# Altium PCB LevitadorMagnetico.PcbDoc
Units mil, origin at the board's own origin, x right, y up, seen from the top; angles counter-clockwise.
Board outline 7874.02 x 5905.51 mil, 2 copper layers (Top Layer, Bottom Layer); 210 components, 111 nets, 574 pads, 24 vias.
Unrouted connection lines stored in the file: 227.
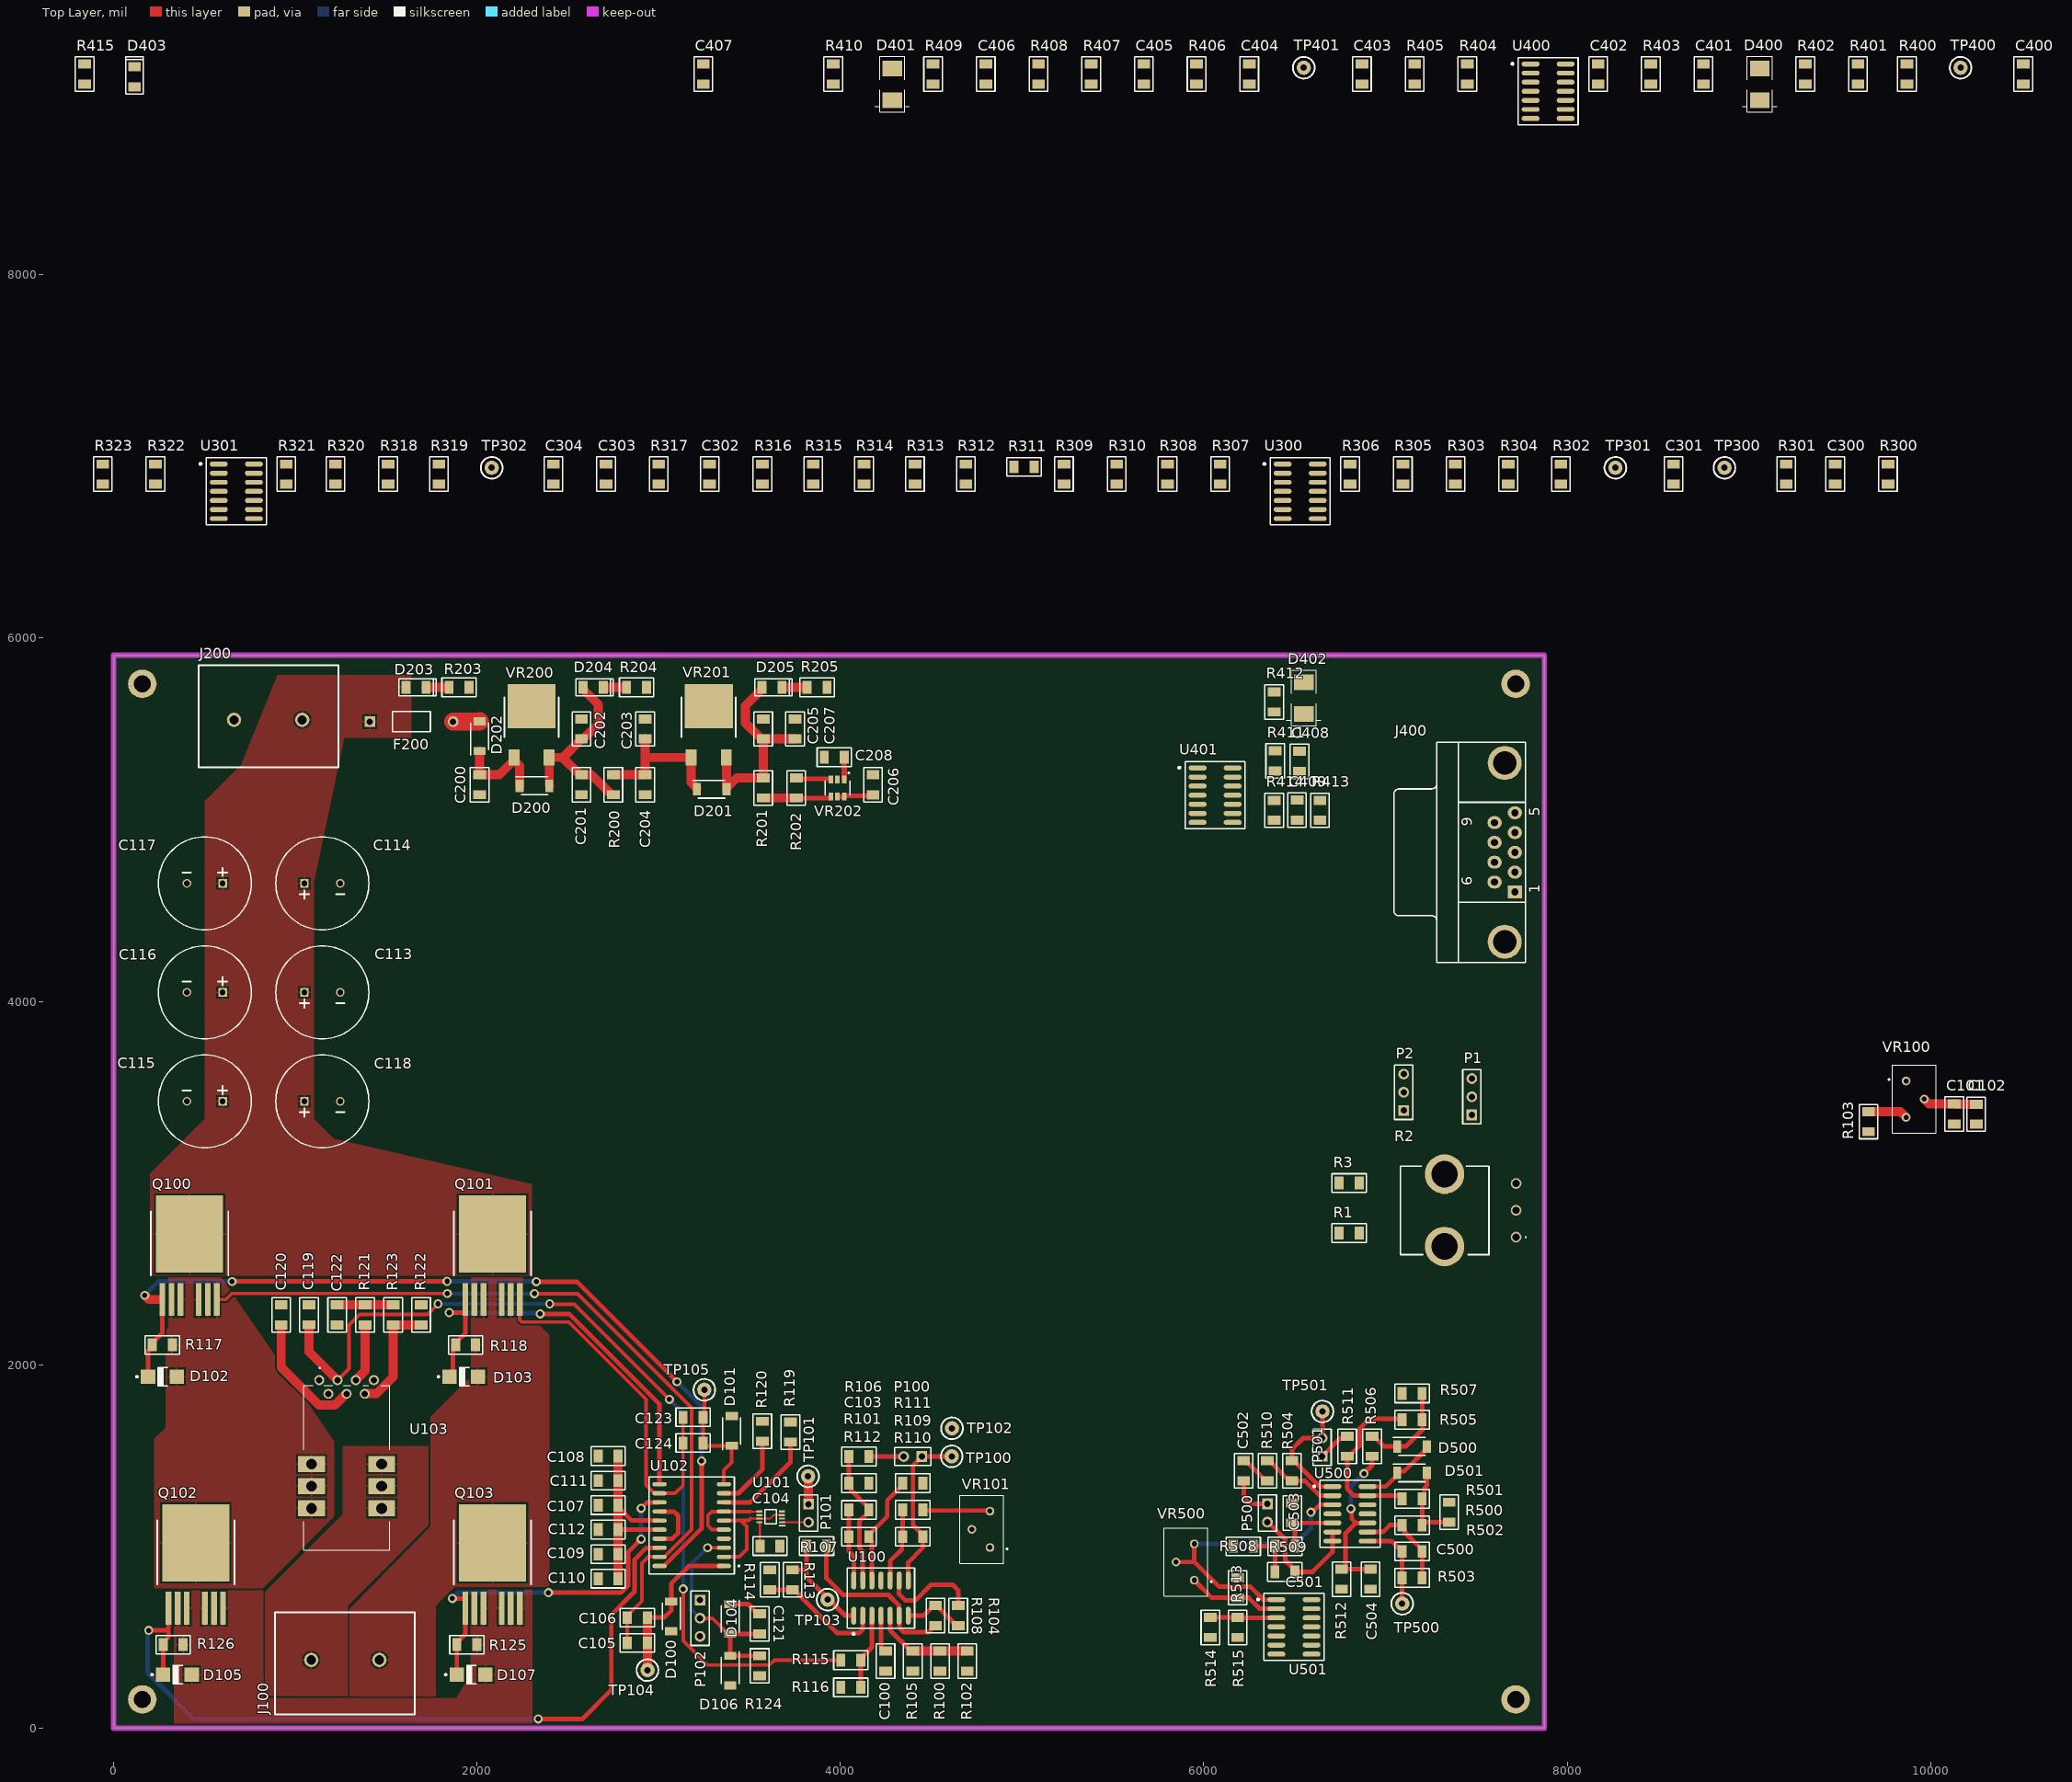
[diagram p0: Top Layer view]
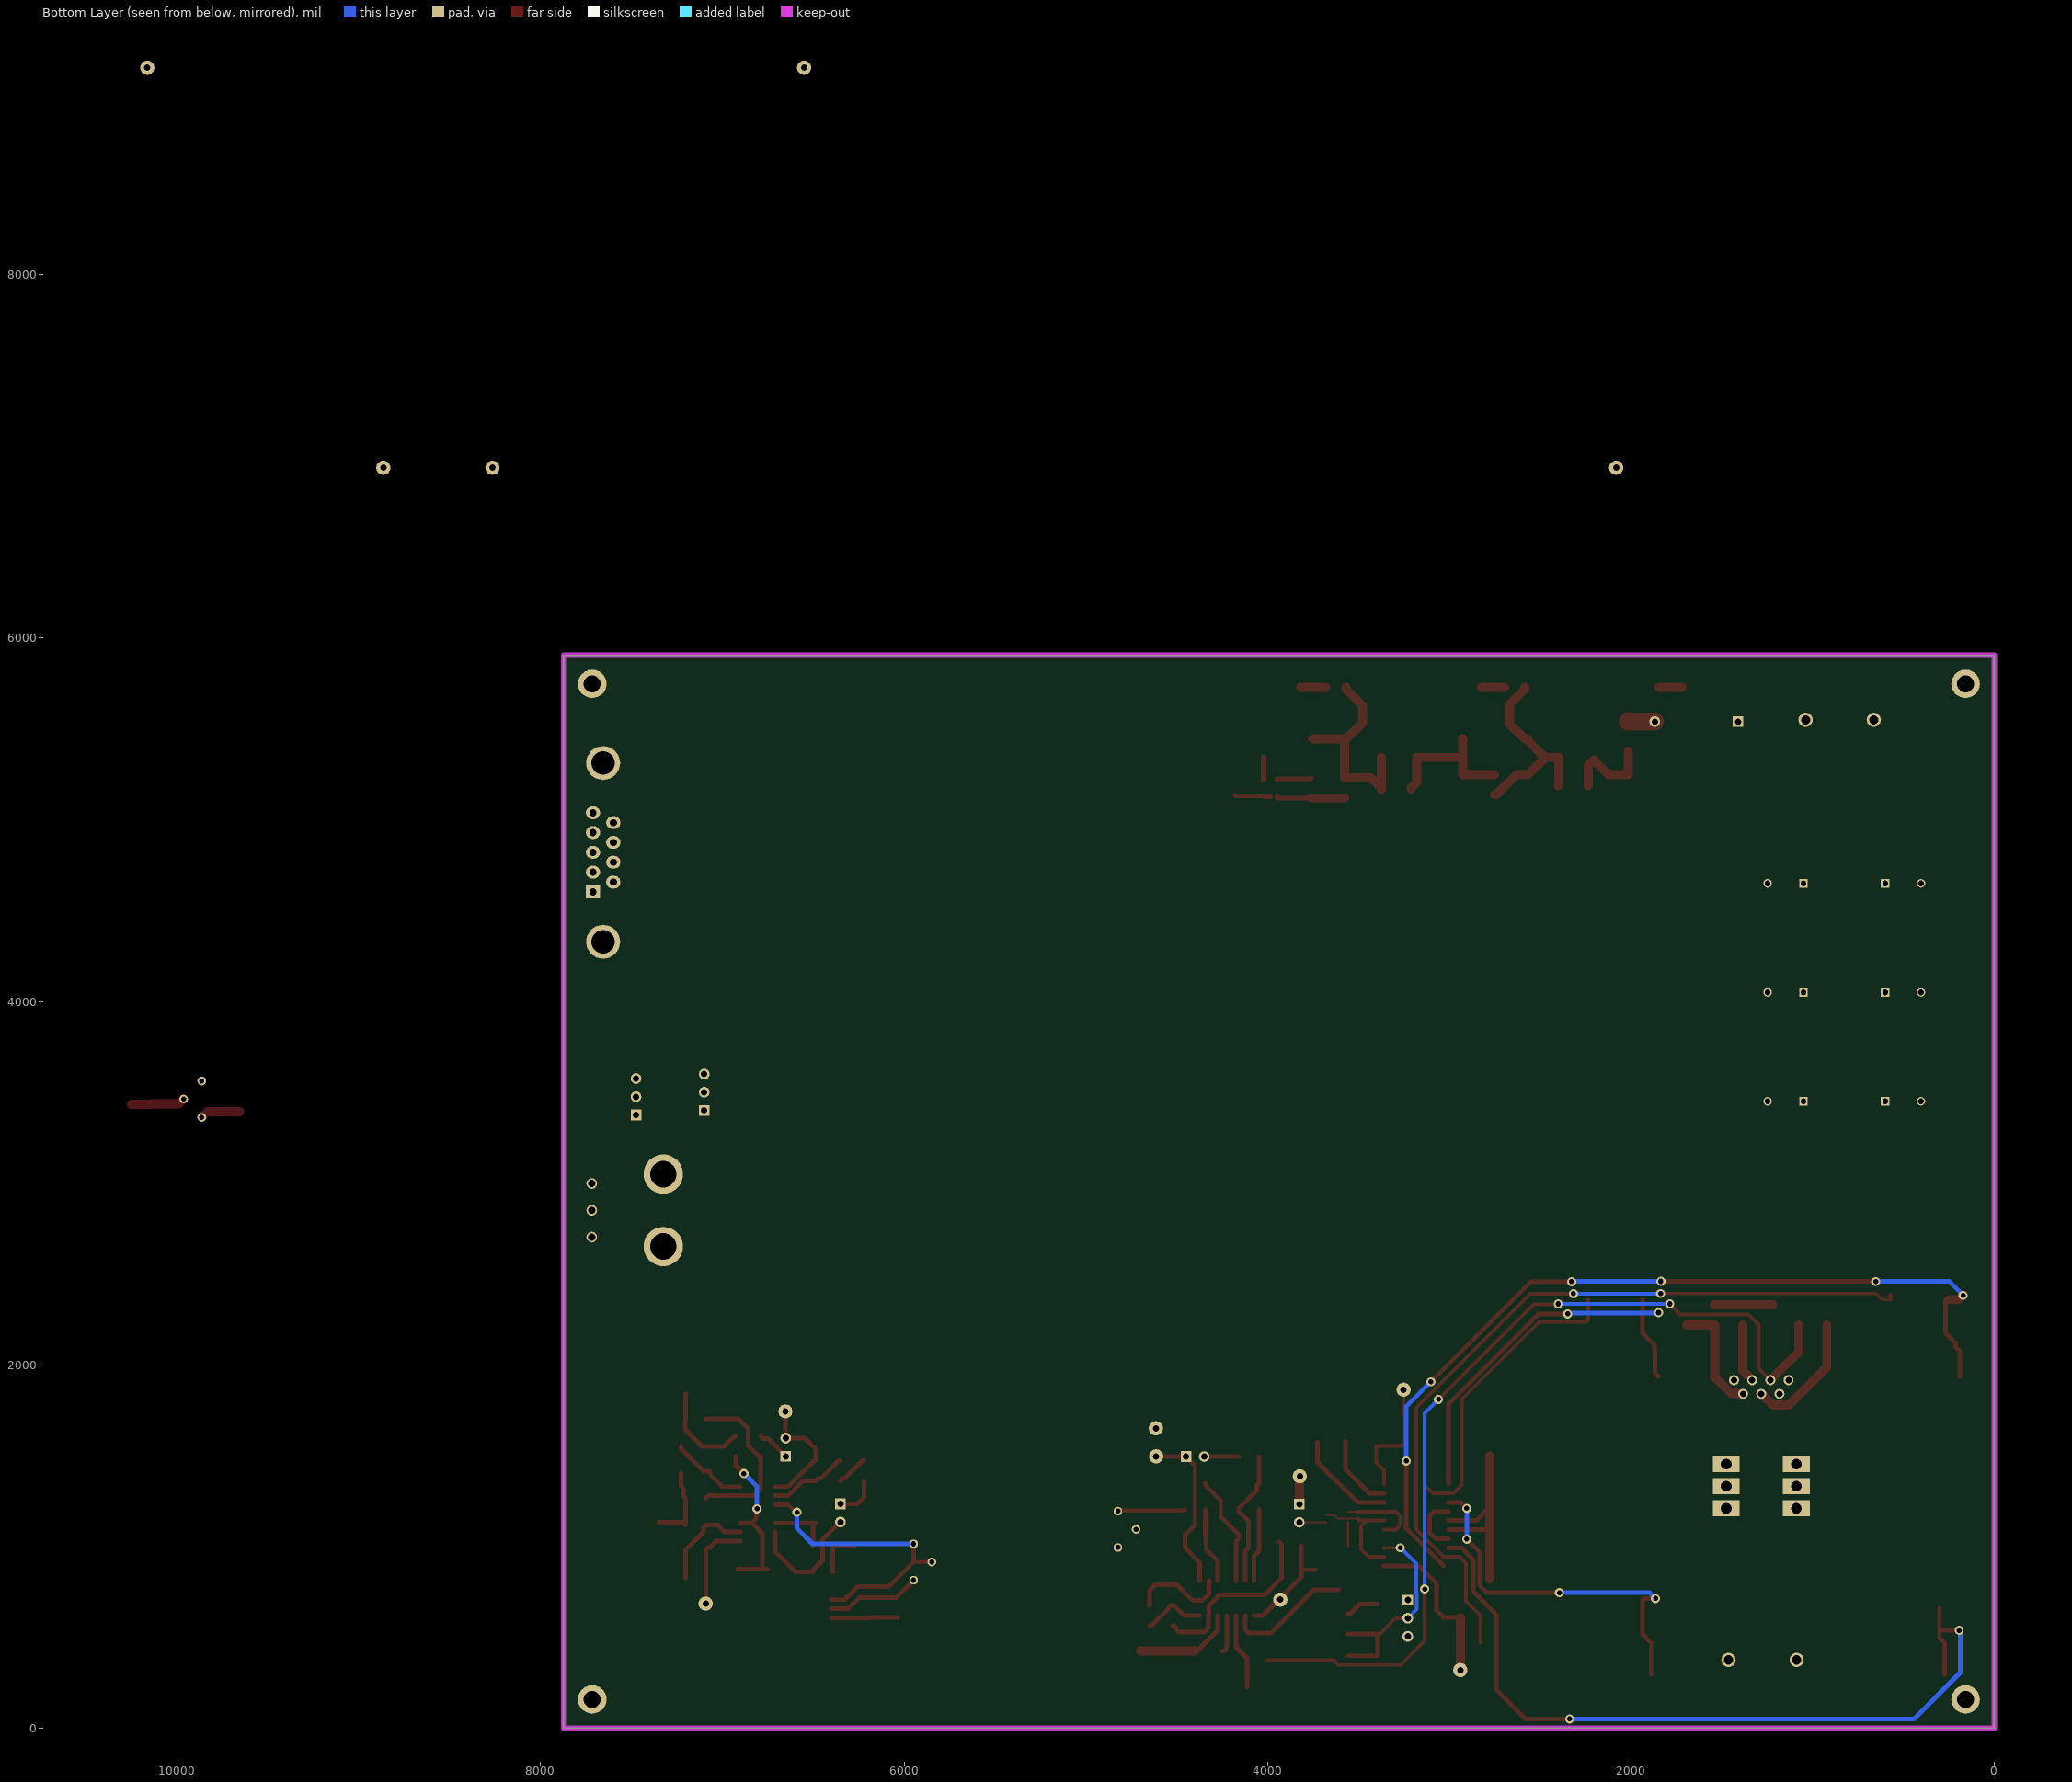
[diagram p1: Bottom Layer view, seen from below]

## Layer stack, top to bottom
Top Solder: solder mask 0.4, Solder Resist, Dk 3.5
Top Layer: signal copper 1.4
Dielectric 1: dielectric 12.6, FR-4, Dk 4.8
Bottom Layer: signal copper 1.4
Bottom Solder: solder mask 0.4, Solder Resist, Dk 3.5

## Board outline
0,0 7874.02,0 7874.02,5905.51 0,5905.51

## Design rules (kind name [scope] priority, off if disabled: settings)
Clearance [All] p1: gap=10 ignorepadtopadclearanceinfootprint=FALSE except(0: Arc-Hole Track-Hole SMDPad-Hole THPad-Hole Via-Hole Fill-Hole Poly-Hole Region-Hole Text-Hole)
PolygonConnect [All] p1: connectstyle=Relief reliefconductorwidth=10 reliefentries=4 polygonreliefangle="90 Angle" airgapwidth=10
RoomDefinition U_Signals2uC [InComponentClass('U_Signals2uC')] p1: confinementstyle=ConfineIn formatcopy=TRUE lockcomponents=FALSE outline -199.8,7975.12 10825,7975.12 10825,9310.12 -199.8,9310.12
RoomDefinition U_Compensador [InComponentClass('U_Compensador')] p2: confinementstyle=ConfineIn formatcopy=TRUE lockcomponents=FALSE outline -124.8,6607.56 9955.2,6607.56 9955.2,7107.56 -124.8,7107.56
RoutingVias [All] p1: holewidth=28 width=50 viastyle="Through Hole" minholewidth=28 minwidth=50 maxholewidth=28 maxwidth=50
SolderMaskExpansion [All] p1: expansion=4 istentingtop=FALSE
Width [All] p1: maxlimit=393.7 minlimit=10 preferedwidth=10 minimp=50.000000 maximp=50.000000 favimp=50.000000
30 further rules are at their usual default settings.

## Classes and differential pairs
component class Principal: P1 P2 R1 R2 R3
component class U_Compensador: C300 C301 C302 C303 C304 R300 R301 R302 R303 R304 R305 R306 R307 R308 R309 R310 R311 R312 R313 R314 R315 R316 R317 R318 R319 R320 R321 R322 R323 TP300 TP301 TP302 U300 U301
component class "U_Controlador de corriente  V3": C100 C101 C102 C103 C104 C105 C106 C107 C108 C109 C110 C111 C112 C113 C114 C115 C116 C117 C118 C119 C120 C121 C122 C123 C124 D100 D101 D102 D103 D104 D105 D106 D107 J100 P100 P101 P102 Q100 Q101 Q102 Q103 R100 R101 R102 R103 R104 R105 R106 R107 R108 R109 R110 R111 R112 R113 R114 R115 R116 R117 R118 R119 R120 R121 R122 R123 R124 R125 R126 TP100 TP101 TP102 TP103 TP104 TP105 U100 U101 U102 U103 VR100 VR101
component class U_Estimador: C500 C501 C502 C503 C504 D500 D501 P500 P501 R500 R501 R502 R503 R504 R505 R506 R507 R508 R509 R510 R511 R512 R513 R514 R515 TP500 TP501 U500 U501 VR500
component class U_Fuentes: C200 C201 C202 C203 C204 C205 C206 C207 C208 D200 D201 D202 D203 D204 D205 F200 J200 R200 R201 R202 R203 R204 R205 VR200 VR201 VR202
component class U_Signals2uC: C400 C401 C402 C403 C404 C405 C406 C407 C408 C409 D400 D401 D402 D403 J400 R400 R401 R402 R403 R404 R405 R406 R407 R408 R409 R410 R411 R412 R413 R414 R415 TP400 TP401 U400 U401

## Components (designator, comment, footprint, x,y, rotation, side; value= is the part's Value field where it differs from the comment)
C100 "Capacitor" C1206 4248.14,368.86 r270 top
C101 "Capacitor" C1206 10130,3380 r90 top
C102 "Capacitor" C1206 10251,3379 r90 top
C103 "Capacitor" C1206 4101.45,1347.61 r0 top
C104 "Capacitor" C1206 3612,1001.86 r180 top
C105 "Capacitor" C1206 2881.94,468.61 r0 top
C106 "Capacitor" C1206 2881.94,607.78 r0 top
C107 "Capacitor" C1206 2721.42,1226.99 r0 top
C108 "Capacitor" C1206 2721.42,1496.96 r0 top
C109 "Capacitor" C1206 2721.42,957.03 r0 top
C110 "Capacitor" C1206 2721.42,822.04 r0 top
C111 "Capacitor" C1206 2721.42,1361.97 r0 top
C112 "Capacitor" C1206 2721.42,1092.01 r0 top
C113 "EKY-350ELL102MK25S" CAPPRD500W60D1300H2650 1050,4050 r0 top
C114 "EKY-350ELL102MK25S" CAPPRD500W60D1300H2650 1050,4650 r0 top
C115 "EKY-350ELL102MK25S" CAPPRD500W60D1300H2650 600,3450 r180 top
C116 "EKY-350ELL102MK25S" CAPPRD500W60D1300H2650 600,4050 r180 top
C117 "EKY-350ELL102MK25S" CAPPRD500W60D1300H2650 600,4650 r180 top
C118 "EKY-350ELL102MK25S" CAPPRD500W60D1300H2650 1050,3450 r0 top
C119 "Capacitor" C1206 1075,2275 r270 top
C120 "Capacitor" C1206 922,2274.02 r90 top
C121 "Capacitor" C1206 3555.45,573.61 r90 top
C122 "Capacitor" C1206 1230,2274.02 r90 top
C123 "Capacitor" C1206 3189.11,1710.72 r0 top
C124 "Capacitor" C1206 3189.11,1568.98 r0 top
C200 "Capacitor" C1206 2014,5193 r90 top
C201 "Capacitor" C1206 2575,5193 r90 top
C202 "Capacitor" C1206 2575,5500 r270 top
C203 "Capacitor" C1206 2925,5500 r270 top
C204 "Capacitor" C1206 2925,5193 r90 top
C205 "Capacitor" C1206 3575,5500 r270 top
C206 "Capacitor" C1206 4179,5192 r270 top
C207 "Capacitor" C1206 3750,5500 r270 top
C208 "Capacitor" C1206 3966,5344 r0 top
C300 "Capacitor" C1206 9475.2,6902.56 r90 top
C301 "Capacitor" C1206 8585.2,6902.56 r90 top
C302 "Capacitor" C1206 3280.2,6902.56 r90 top
C303 "Capacitor" C1206 2710.2,6902.56 r90 top
C304 "Capacitor" C1206 2420.2,6902.56 r90 top
C400 "Capacitor" C1206 10510,9105.12 r90 top
C401 "Capacitor" C1206 8750,9105.12 r90 top
C402 "Capacitor" C1206 8170,9105.12 r90 top
C403 "Capacitor" C1206 6870,9105.12 r90 top
C404 "Capacitor" C1206 6250,9105.12 r90 top
C405 "Capacitor" C1206 5670,9105.12 r90 top
C406 "Capacitor" C1206 4800,9105.12 r90 top
C407 "Capacitor" C1206 3245,9105.12 r90 top
C408 "Capacitor" C1206 6526.77,5321.65 r270 top
C409 "Capacitor" C1206 6512.99,5052.95 r270 top
C500 "Capacitor" C1206 7146,971.82 r0 top
C501 "Capacitor" C1206 6446,860 r180 top
C502 "Capacitor" C1206 6219.35,1416.68 r90 top
C503 "Capacitor" C1206 6487,1184 r90 top
C504 "Capacitor" C1206 6917.07,819.67 r90 top
D100 "RSX205LAM30TR" SODFL4725X105N 3068.45,614.61 r270 top
D101 "RSX205LAM30TR" SODFL4725X105N 3401.45,1635.61 r90 top
D102 "SMAJ15A" ONSC-SMA-2-403D-02_F_V 268,1934 r0 top
D103 "SMAJ15A" ONSC-SMA-2-403D-02_F_V 1927.01,1934 r0 top
D104 "RSX205LAM30TR" SODFL4725X105N 3393.45,600.61 r270 top
D105 "SMAJ15A" ONSC-SMA-2-403D-02_F_V 351,294 r0 top
D106 "RSX205LAM30TR" SODFL4725X105N 3393.45,316.31 r270 top
D107 "SMAJ15A" ONSC-SMA-2-403D-02_F_V 1967.01,294 r0 top
D200 "RSX205LAM30TR" SODFL4725X105N 2316.18,5186.62 r0 top
D201 "RSX205LAM30TR" SODFL4725X105N 3291,5168 r0 top
D202 "RSX205LAM30TR" SODFL4725X105N 2014,5460 r90 top
D203 "LED" "LED 1206 RED" 1664,5729 r0 top
D204 "LED" "LED 1206 RED" 2639.12,5729 r0 top
D205 "LED" "LED 1206 RED" 3623,5729 r0 top
D400 "Diodo Zener" SMB 9060,9135.12 r90 top
D401 "Diodo Zener" SMB 4285,9135.12 r90 top
D402 "Diodo Zener" SMB 6550.39,5756.5 r90 top
D403 "LED" "LED 1206 RED" 115,9090.12 r90 top
D500 "RSX205LAM30TR" SODFL4725X105N 7146,1549.97 r0 top
D501 "RSX205LAM30TR" SODFL4725X105N 7146,1404.94 r0 top
F200 "Fuse" PIN-W2/E2.8 1639,5540 r0 top
J100 "Header 2" SMKDS5-2-9.5 1275,375 r0 top
J200 "Header 2" SMKDS5-2-9.5 850,5550 r180 top
J400 "DB9H" DB9H 7711.81,4602.36 r90 top
P1 "Header 3" HDR1X3 7475,3375 r90 top
P2 "Header 3" HDR1X3 7100,3400 r90 top
P100 "Header 2" HDR1X2 4448.14,1494.61 r180 top
P101 "Header 2" HDR1X2 3824.45,1232.61 r270 top
P102 "Header 3" HDR1X3 3227.45,704.61 r270 top
P500 "Header 2" HDR1X2 6350,1234 r270 top
P501 "Header 2" HDR1X2 6651,1496 r90 top
Q100 "IPB160N04" TO263-7S 418,2719.24 r0 top
Q101 "IPB160N04" TO263-7S 2085,2719.24 r0 top
Q102 "IPB160N04" TO263-7S 452,1019.24 r0 top
Q103 "IPB160N04" TO263-7S 2085,1019.24 r0 top
R1 "374" R1206 6800,2725 r180 top
R2 "Potenciometro" pote_5_pines_vertical 7325,2850 r90 top
R3 "4k3" R1206 6800,3000 r0 top
R100 "3k2" R1206 4548.14,368.86 r270 top
R101 "10k" R1206 4101.45,1200.61 r180 top
R102 "10k" R1206 4698.14,368.86 r90 top
R103 "1k" R1206 9658,3338 r90 top
R104 "500" R1206 4648.14,618.86 r90 top
R105 "4k7" R1206 4398.14,368.86 r90 top
R106 "15k" R1206 4101.45,1494.61 r180 top
R107 "10k" R1206 3868.14,1001.86 r0 top
R108 "10k" R1206 4523.14,618.86 r90 top
R109 "500" R1206 4398.14,1201 r0 top
R110 "200k" R1206 4398.14,1053.61 r0 top
R111 "2k" R1206 4398.14,1348.39 r0 top
R112 "10k" R1206 4101.45,1053.61 r180 top
R113 "1k" R1206 3736.14,815.86 r90 top
R114 "1k" R1206 3611.14,815.86 r270 top
R115 "1k" R1206 4057.14,373.86 r0 top
R116 "1k" R1206 4057.14,223.86 r0 top
R117 "4k7" R1206 268,2109 r180 top
R118 "4k7" R1206 1937.02,2109 r0 top
R119 "200k" R1206 3724.51,1629.43 r90 top
R120 "200k" R1206 3569.98,1633.36 r90 top
R121 "100K" R1206 1384,2274.02 r90 top
R122 "1k" R1206 1692,2274.02 r90 top
R123 "0R" R1206 1538,2274.02 r270 top
R124 "10k" R1206 3555.45,342.31 r90 top
R125 "4k7" R1206 1944.02,459 r0 top
R126 "4k7" R1206 327,459 r180 top
R200 "0R" R1206 2750,5193 r270 top
R201 "0R" R1206 3575,5175 r90 top
R202 "4k7" R1206 3757,5175 r270 top
R203 "2.37K" R1206 1901,5729 r180 top
R204 "1k" R1206 2878,5729 r0 top
R205 "300" R1206 3871,5729 r180 top
R300 "1M" R1206 9765.2,6902.56 r90 top
R301 "1k" R1206 9205.2,6902.56 r90 top
R302 "1k" R1206 7965.2,6902.56 r90 top
R303 "1k" R1206 7385.2,6902.56 r90 top
R304 "1k" R1206 7675.2,6902.56 r90 top
R305 "1k" R1206 7095.2,6902.56 r90 top
R306 "1k" R1206 6805.2,6902.56 r90 top
R307 "1k" R1206 6090.2,6902.56 r90 top
R308 "1k" R1206 5800.2,6902.56 r90 top
R309 "1k" R1206 5230.2,6902.56 r90 top
R310 "1k" R1206 5520.2,6902.56 r90 top
R311 "1k" R1206 5010.2,6942.56 r0 top
R312 "100k" R1206 4690.2,6902.56 r90 top
R313 "100k" R1206 4410.2,6902.56 r90 top
R314 "221" R1206 4130.2,6902.56 r90 top
R315 "221" R1206 3850.2,6902.56 r90 top
R316 "4k3" R1206 3570.2,6902.56 r90 top
R317 "4k3" R1206 3000.2,6902.56 r90 top
R318 "100k" R1206 1510.2,6902.56 r90 top
R319 "800k" R1206 1790.2,6902.56 r90 top
R320 "100k" R1206 1220.2,6902.56 r90 top
R321 "1k" R1206 950.2,6902.56 r90 top
R322 "1k" R1206 230.2,6902.56 r90 top
R323 "800k" R1206 -59.8,6902.56 r90 top
R400 "10k" R1206 9870,9105.12 r90 top
R401 "10k" R1206 9600,9105.12 r90 top
R402 "10k" R1206 9310,9105.12 r90 top
R403 "10k" R1206 8460,9105.12 r90 top
R404 "12k" R1206 7450,9105.12 r90 top
R405 "1k" R1206 7160,9105.12 r90 top
R406 "10k" R1206 5960,9105.12 r90 top
R407 "10k" R1206 5380,9105.12 r90 top
R408 "1k" R1206 5090,9105.12 r90 top
R409 "1k" R1206 4510,9105.12 r90 top
R410 "10k" R1206 3960,9105.12 r90 top
R411 "10k" R1206 6392.91,5323.62 r90 top
R412 "10k" R1206 6387.01,5648.43 r270 top
R413 "10k" R1206 6638.98,5051.97 r90 top
R414 "10k" R1206 6387.01,5051.97 r90 top
R415 "2.37K" R1206 -160,9105.12 r90 top
R500 "1.8M" R1206 7350.25,1188.01 r90 top
R501 "3.56K" R1206 7146,1261.88 r0 top
R502 "100K" R1206 7146,1116.85 r180 top
R503 "100K" R1206 7146,826.79 r0 top
R504 "25K" R1206 6485,1416.68 r90 top
R505 "3.56K" R1206 7146,1696.97 r0 top
R506 "100K" R1206 6926,1551 r270 top
R507 "1.8M" R1206 7146,1842 r0 top
R508 "8.9K" R1206 6216.88,1000.5 r0 top
R509 "15K" R1206 6447,1000.5 r0 top
R510 "10" R1206 6350,1416.68 r90 top
R511 "3.56K" R1206 6789.09,1551 r270 top
R512 "100K" R1206 6757.62,819.67 r270 top
R513 "1K" R1206 6186,772 r270 top
R514 "293" R1206 6036,554 r90 top
R515 "1k" R1206 6186,554 r90 top
TP100 "V_Hist" "TestPoint Keystone 5000 Silver-Red" 4612.45,1495.61 r90 top
TP101 "Vout_osc_HF" "TestPoint Keystone 5000 Silver-Red" 3822,1386 r90 top
TP102 "GND" "TestPoint Keystone 5000 Silver-Red" 4614,1650 r90 top
TP103 "Vi_Feed" "TestPoint Keystone 5000 Silver-Red" 3929,707 r90 top
TP104 "BHB" "TestPoint Keystone 5000 Silver-Red" 2938,319 r90 top
TP105 "AHB" "TestPoint Keystone 5000 Silver-Red" 3251,1862 r90 top
TP300 "Verror1" "TestPoint Keystone 5000 Silver-Red" 8865.2,6937.56 r90 top
TP301 "Verror2" "TestPoint Keystone 5000 Silver-Red" 8265.2,6937.56 r90 top
TP302 "Vcomp_A" "TestPoint Keystone 5000 Silver-Red" 2080.2,6937.56 r90 top
TP400 "Vcomp_D" "TestPoint Keystone 5000 Silver-Red" 10165,9140.12 r90 top
TP401 "Vpos_Est_D" "TestPoint Keystone 5000 Silver-Red" 6550,9140.12 r90 top
TP500 "Vpos_Est_A" "TestPoint Keystone 5000 Silver-Red" 7092,685 r90 top
TP501 "Vder" "TestPoint Keystone 5000 Silver-Red" 6653,1743 r90 top
U100 "MCP664" SOIC14 4248.14,715.32 r90 top
U101 "SN74LVC3G06DCUT" SOP50P310X90-8N 3616.45,1162.61 r180 top
U102 "HIP4081A" SOIC20 3181.23,1117.21 r180 top
U103 "HO_15-NP-0000" HO15NP0000 1132,1915 r270 top
U300 "MCP664" SOIC14 6530.2,6782.56 r0 top
U301 "MCP664" SOIC14 675.2,6782.56 r0 top
U400 "MCP664" SOIC14 7895,8985.12 r0 top
U401 "MCP664" SOIC14 6062.2,5110.04 r0 top
U500 "MCP664" SOIC14 6804.54,1154.14 r0 top
U501 "MCP664" SOIC14 6496,532 r0 top
VR100 "Trimmer (Thru-Hole)" 3299Y1203LF 9864.95,3562.06 r180 top
VR101 "Trimmer (Thru-Hole)" 3299Y1203LF 4823.14,993.86 r0 top
VR200 "Volt Reg" TO252-AA 2300,5625 r0 top
VR201 "Volt Reg" TO252-AA 3275,5625 r0 top
VR202 "MAX6071" SOT23-6 3984,5174 r270 top
VR500 "Trimmer (Thru-Hole)" 3299Y1203LF 5947,814 r0 top

## Footprints (in the part's own frame and the unit in brackets; to place one, negate y for a bottom-side part, rotate by r counter-clockwise, add the part's x,y. Pads: shape width x height; smd on the part's side, far side on the other; paste and mask are expansions set on the pad)
3299Y1203LF [mm]
  round 1.217 hole 0.71: 1(0,0) 2(-2.54,2.54) 3(0,5.08)
  silkscreen extent -4.19,-2.22 2.5,7.3, body extent -4.19,-2.22 1.91,7.3, height 11.65
C1206 [mil]
  rect 50x70 smd: 1(-55.12,0) 2(55.12,0)
  silkscreen extent -94,-51 94,51, body extent -63,-31 63,31, height 39
CAPPRD500W60D1300H2650 [mm]
  rect 1.2x1.2 hole 0.8: 1(0,0)
  round 1.2 hole 0.8: 2(5,0)
  silkscreen extent -4,-6.5 9,6.5, body extent -4,-6.5 9,6.5, height 26.5
DB9H [mm]
  rect 1.8x2 hole 1: 1(0,0)
  oval 1.8x2 hole 1: 2(2.77,0) 3(5.54,0) 4(8.31,0) 5(11.08,0) 6(1.385,2.84) 7(4.155,2.84) 8(6.925,2.84) 9(9.695,2.84)
  round 4.76 hole 3.26: 10(-6.955,1.42) 11(18.035,1.42)
  silkscreen extent -9.86,-1.48 20.94,16.92, body extent -9.84,-2.08 20.97,16.99, height 12.58
HDR1X2 [mm]
  rect 1.5x1.5 hole 0.9: 1(0,0)
  round 1.5 hole 0.9: 2(2.54,0)
  silkscreen extent -1.27,-1.27 3.81,1.27, body extent -1.27,-1.27 3.81,1.27, height 8.54
HDR1X3 [mm] "Connector; Header; 3 Position"
  rect 1.5x1.5 hole 0.9: 1(0,0)
  round 1.5 hole 0.9: 2(2.54,0) 3(5.08,0)
  silkscreen extent -1.27,-1.27 6.35,1.27, body extent -1.27,-1.27 6.35,1.27, height 8.54
HO15NP0000 [mm]
  round 1.4 hole 0.9: 1(0,0) 2(1.905,1.27) 3(0,2.54) 4(1.905,3.81) 5(0,5.08) 6(1.905,6.35) 7(0,7.62)
  rect 2.25x3.75 hole 1.5: 8(11.735,8.71) 9(14.835,8.71) 10(17.935,8.71) 11(17.935,-1.09) 12(14.835,-1.09) 13(11.735,-1.09)
  silkscreen extent -1.75,-2.19 23.75,9.81, body extent -0.18,-2.21 23.75,9.79, height 11.9
"LED 1206 RED" [mil] "Led SMD 1206"
  rect 50x70 smd: 1(-55.12,0) 2(55.12,0)
  silkscreen extent -95,-47 110,47, body extent -65,-31 69,32, height 20
ONSC-SMA-2-403D-02_F_V [mm] "Molded, 2-Leads, Body 4.32x2.6mm"
  rect 2x2 smd: 1(-2,0) 2(2,0)
  silkscreen extent -3.67,-1.3 0.74,1.3, body extent -2.16,-1.3 2.16,1.3, height 2.2
PIN-W2/E2.8 [mm] "Thru-Hole; 2 Leads"
  rect 1.5x1.5 hole 0.9: 1(-5.825,0)
  round 1.5 hole 0.9: 2(5.825,0)
  silkscreen extent -2.65,-1.4 2.65,1.4
pote_5_pines_vertical [mm]
  round 1.5 hole 1: 1(-3.75,-10) 2(0,-10) 3(3.75,-10)
  round 5.52 hole 3.68: GND(-5.05,0) GND(5.05,0)
  silkscreen extent -6.2,-11.4 6.2,6.2, body extent -6.79,-10.4 6.79,6.2, height 25.1
R1206 [mil]
  rect 50x70 smd: 1(-55.12,0) 2(55.12,0)
  silkscreen extent -94,-51 94,51, body extent -63,-31 63,31, height 39
SMB [mil] "Para diodos como  4007, supresores, etc"
  rect 85x108 smd: 1(0,0) 2(-175,0)
  silkscreen extent -240,-95 68,95, body extent -194,-55 14,55, height 92
SMKDS5-2-9.5 [mm] "Phoenix Contact; Terminal block; 2way; 32A max; 9.52mm pitch; 135°"
  round 2 hole 1.3: 1(-4.76,0) 2(4.76,0)
  silkscreen extent -9.8,-7.65 9.73,6.65, body extent -10.08,-7.5 9.53,11, height 21.5
SODFL4725X105N [mm]
  rect 1.12x1.72 smd: 1(-2.075,0) 2(2.075,0)
  silkscreen extent -2.64,-1.25 1.85,1.25, body extent -2.35,-1.25 2.35,1.25, height 1.05
SOIC14 [mm]
  oval 2.5x0.7 smd: 1(-2.45,4.445) 2(-2.45,3.175) 3(-2.45,1.905) 4(-2.45,0.635) 5(-2.45,-0.635) 6(-2.45,-1.905) 7(-2.45,-3.175) 8(2.45,-3.175) 9(2.45,-1.905) 10(2.45,-0.635) 11(2.45,0.635) 12(2.45,1.905) 13(2.45,3.175) 14(2.45,4.445)
  silkscreen extent -5.16,-4.06 4.19,5.33, body extent -3.12,-3.68 3.07,4.95, height 1.7
SOIC20 [mm]
  oval 2x0.6 smd: 1(-4.5,5.715) 2(-4.5,4.445) 3(-4.5,3.175) 4(-4.5,1.905) 5(-4.5,0.635) 6(-4.5,-0.635) 7(-4.5,-1.905) 8(-4.5,-3.175) 9(-4.5,-4.445) 10(-4.5,-5.715) 11(4.5,-5.715) 12(4.5,-4.445) 13(4.5,-3.175) 14(4.5,-1.905) 15(4.5,-0.635) 16(4.5,0.635) 17(4.5,1.905) 18(4.5,3.175) 19(4.5,4.445) 20(4.5,5.715)
  silkscreen extent -6.68,-6.73 5.97,6.86, body extent -5.31,-6.5 5.31,6.5, height 2.66
SOP50P310X90-8N [mm]
  rect 0.85x0.3 smd: 1(-1.575,0.75) 2(-1.575,0.25) 3(-1.575,-0.25) 4(-1.575,-0.75) 5(1.575,-0.75) 6(1.575,-0.25) 7(1.575,0.25) 8(1.575,0.75)
  silkscreen extent -2,-1 0.8,1.25, body extent -1.55,-1 1.55,1, height 0.77
SOT23-6 [mm]
  rect 1.1x0.65 smd: 1(-1.2,0.95) 2(-1.2,0) 3(-1.2,-0.95) 4(1.2,-0.95) 5(1.2,0) 6(1.2,0.95)
  silkscreen extent -2.19,-1.75 1,1.75, body extent -1.5,-1.5 1.5,1.5, height 1.39
"TestPoint Keystone 5000 Silver-Red" [mm]
  round 2 hole 0.9: 1(0,0)
  silkscreen extent -1.52,-1.52 1.51,1.52, body extent -1.27,-1.27 1.27,1.27, height 4.89
TO252-AA [mil]
  rect 60x89 smd: 1(-97,-282) 3(97,-282)
  rect 265x245 smd: 2(0,0)
  silkscreen extent -149,-169 149,48, body extent -133,-291 133,107, height 156
TO263-7S [mm]
  rect 0.8x4.6 smd: 1(-3.81,-9.15) 2(-2.54,-9.15) 3(-1.27,-9.15) 5(1.27,-9.15) 6(2.54,-9.15) 7(3.81,-9.15)
  rect 9.4x10.8 smd: 4(0,0)
  silkscreen extent -5.41,-5.79 5.41,3.15, body extent -5.03,-10.97 4.97,4.7, height 4.78

## Part data
C113 C114 C115 C116 C117 C118: "Capacitor Polarised"
D100 D101 D104 D106 D200 D201 D202 D500 D501: "Schottky Diode"
D102 D103 D105 D107: library part 1SMA60CAT3G, "400 W Peak Power Zener Transient Voltage Suppressor, 2-Pin SMA, Pb-Free, Tape and Reel"
D203 D204 D205 D403: "Typical RED GaAs LED"
D400 D401 D402: "SZ1SMB5915BT3G"
J100 J200 P100 P101 P500 P501: "Header, 2-Pin"
P1 P2 P102: "Header, 3-Pin"
Q100 Q101 Q102 Q103: "HEXFET N-Channel Power MOSFET"
R1 R3 R100 R101 R102 R103 R104 R105 R106 R107 R108 R109 R110 R111 R112 R113 R114 R115 R116 R117 R118 R119 R120 R121 R122 R123 R124 R125 R126 R200 R201 R202 R203 R204 R205 R300 R301 R302 R303 R304 R305 R306 R307 R308 R309 R310 R311 R312 R313 R314 R315 R316 R317 R318 R319 R320 R321 R322 R323 R400 R401 R402 R403 R404 R405 R406 R407 R408 R409 R410 R411 R412 R413 R414 R415 R500 R501 R502 R503 R504 R505 R506 R507 R508 R509 R510 R511 R512 R513 R514 R515: library part R1206, "Resistor Chip; 1/8W;"
R2: "Vertical - 5 pines"
TP100 TP101 TP102 TP103 TP104 TP105 TP300 TP301 TP302 TP400 TP401 TP500 TP501: library part Testpoint
U101: "Schmitt-Trigger Inverter"
U102: "INTERSIL, 80V, 2.5A peak, High Frequency Full Bridge FET Driver"
U103: "Integrated Circuit"
VR100 VR101 VR500: library part Trimmer, "Res Cermet Trimmer 500K Ohm 10% 0.5W 25(Elec)Turn 2.19mm (9.53 X 4.83 X 11.55mm) Pin Thru-Hole Tube"
VR200 VR201: "Voltage Regulator"
VR202: library part MAX6070

## Free pads (board coordinates)
  round 157.48 hole 94.49: 0(157.48,157.48) 0(157.48,5748.03) 0(7716.54,157.48) 0(7716.54,5748.03)

## Via types
v1: diameter 50, hole 28, Top Layer to Bottom Layer, 24 vias

## Nets (pads, with @x,y where several pads share a name; then routed paths per layer and width w, separated by ;. In a path a pad name is that pad's centre, name@x,y a point inside that pad or via, vN(x,y) a via of type N, cw(c..) or ccw(c..) an arc to the next point about the centre after c; other vN are vias at no path point)
+2.5V: C206.2 J400.2 R111.2 R114.1 R301.2 R302.2 R307.1 R319.2 R408.2 R412.1 R512.2 R514.1 U301.3 U301.5 U500.12 VR101.1 VR101.2 VR202.5 VR202.6 | length 202
  Top Layer w25: VR202.5 VR202.6 4021.4,5131.52 4021.7,5131.82 4173.94,5131.82 C206.2
+2.6V: C101.2 C102.2 C120.1 R100.2 U103.4 VR100.2 | length 1003.4
  Top Layer w50: C120.1 922,1985 1129.56,1777.44 1218.06,1777.44 1280.62,1840 U103.4 ; VR100.2 9991.9,3435.12 C101.2 10140,3435.12 10141,3434.12 C102.2
+5.0V: C122.2 R121.2 R123.1 R500.2 U103.1 | length 318
  Top Layer w50: C122.2@1220,2329.13 C122.2 R121.2 R123.1
+5V: C100.1 C104.2 C205.2 C207.2 C301.2 C302.2 C405.1 D201.2 D205.1 R1.2 R201.2 U100.4 U101.8 U300.4 U301.4 U400.4 U401.4 U500.4 U501.4 VR100.1 VR201.3 | length 1504.9
  Top Layer w12: C104.2 3557,1001.98 U101.8@3557,1130.86
  Top Layer w25: U100.4 4223.14,448.98 4225.64,446.48 4225.64,436.48 4238.14,423.98 C100.1
  Top Layer w50: VR201.3 3372.35,5342.65 3372.35,5168.35 D201.2 3372.69,5173.91 3428.91,5230.12 R201.2 C205.2 ; D205.1 3567.88,5719 3477,5628.12 3477,5532.88 3565,5444.88 C205.2 ; C207.2 C205.2
+12V: C107.2 C108.2 C109.2 C110.2 C111.2 C112.2 C121.2 C201.2 C202.2 D100.2 D101.2 D104.1 D200.2 D204.1 P102.3 R200.2 U102.15 U102.16 VR200.3 | length 2454.1
  Top Layer w25: C112.2 2776.64,1092.11 3003.97,1092.11 U102.16 ; C107.2 2776.54,1216.99 2851.31,1142.21 U102.15 ; D104.1 3491.88,682.3 3545.45,628.72 C121.2
  Top Layer w50: D200.2 2397.44,5187.05 2397.44,5342.56 VR200.3 2473.12,5343 ; D204.1 2584,5719 2667,5636 2667,5526.88 2585,5444.88 C202.2 2565,5444.88 2565,5434.88 2473.12,5343 ; R200.2 2740,5137.88 2629.76,5248.12 C201.2 2565,5248.12 2473.12,5340 2473.12,5343 ; C110.2 C109.2 C112.2 C107.2@2776.54,1216.99 ; C107.2 C111.2 C108.2
+24V: C113.1 C114.1 C115.1 C116.1 C117.1 C118.1 D203.1 F200.1 J200.1 Q100.4 Q101.4
AHB: C123.2 C124.2 D101.1 TP105.1 U102.10 | length 688.9
  Top Layer w20: TP105.1 3251,1717.49 C123.2 C124.2 3244.22,1568.91 3259.22,1553.91 D101.1 3401.45,1462.61 3358.4,1419.55 U102.10
AHO: D103.1 Q101.1 R118.1 U102.11 | length 2381.8
  Top Layer w25: v1(1847,2287) 1931.75,2287 1935,2290.25 Q101.1@1935,2315.25 ; D103.1 1867,1952.73 1867,2071.86 1869.4,2074.25 1869.4,2106.5 1935,2172.1 Q101.1@1935,2315.25 ; Q101.1 Q101.1@1935,2315.25 ; v1(2348,2280) 2506.96,2280 3004.07,1782.89 U102.11
  Bottom Layer w25: v1(1847,2287) 1850.5,2283.5 2344.5,2283.5 v1(2348,2280)
AHS: C123.1 C124.1 D103.2 J100.2 Q101.2 Q101.3 Q101.5 Q101.6 Q101.7 Q103.4 R118.2 U102.12 | length 2076.1
  Top Layer w20: Q101.7 2235,2246.72 2246.72,2235 2506,2235 2931,1810 2931,1337.72 2976.51,1292.21 U102.12 3090.06,1292.21 3133.99,1336.14 C124.1 C123.1
AHS2: J100.1 U103.8 U103.9 U103.10
ALO: D107.1 Q103.1 R125.1 U102.13 | length 2073.1
  Top Layer w25: v1(1864,713) 1931.75,713 1935,709.75 Q103.1 1935,515.1 1888.9,469 R125.1 1888.9,294.63 D107.1 ; v1(2393,745) 2791.31,745 2832,785.69 2832,969 v1(2903,1040) ; v1(2903,1209) 2936.21,1242.21 U102.13
  Bottom Layer w25: v1(1864,713) 1896,745 v1(2393,745) ; v1(2903,1040) v1(2903,1209)
BHB: C105.2 C106.2 D100.1 TP104.1 U102.1 | length 915
  Top Layer w25: C106.2 2938.28,609 3031,609 3068.45,646.45 D100.1 3068.45,794.45 3166.21,892.21 U102.1
  Top Layer w50: C106.2 C105.2 2937.06,319.94 TP104.1
BHI/ALI: U101.3 U101.7 U102.2 U102.6 | length 647.9
  Top Layer w10: 3505.53,1152.76 U101.7 3612.61,1152.76 3632.3,1172.45 U101.3
  Top Layer w20: U102.2 3443.06,942.21 3484.45,983.61 3484.45,1109.61 3451.85,1142.21 ; U102.6 3451.85,1142.21 ; 3505.53,1152.76 3494.98,1142.21 3451.85,1142.21
BHO: D102.1 Q100.1 R117.2 U102.20 | length 4909.6
  Top Layer w25: D102.1 189.26,2075.38 212.88,2099 R117.2 212.88,2119 268,2174.12 Q100.1 247,2359 ; v1(652,2458) 653,2459 v1(1835,2459) ; v1(2326,2457) 2549.64,2457 v1(3100.32,1906.32) ; U102.20@3030.94,892.9 3236,1097.96 v1(3236,1470)
  Top Layer w50: v1(171,2382) 194,2359 247,2359
  Bottom Layer w25: v1(171,2382) 247,2458 v1(652,2458) ; v1(1835,2459) 1836,2458 2325,2458 v1(2326,2457) ; v1(3100.32,1906.32) 3101.68,1906.32 3236,1772 v1(3236,1470)
BHS: C105.1 C106.1 D102.2 Q100.2 Q100.3 Q100.5 Q100.6 Q100.7 Q102.4 R117.1 U102.19 U103.11 U103.12 U103.13 | length 4388
  Top Layer w20: Q100.7 616.6,2359 649.6,2392 v1(1836,2392) ; Q100.7@568,2377.25 Q100.7@573.75,2383 ; v1(2316,2391) 2552,2391 3181,1762 3181,1091.59 3031.63,942.21 2942.6,942.21 2908,907.61 2908,698.96 2826.82,617.78 C106.1 C105.1
  Bottom Layer w20: v1(1836,2392) 1836.5,2391.5 2315.5,2391.5 v1(2316,2391)
BLI/AHI: U101.5 U102.5 U102.7 | length 446.2
  Top Layer w10: 3505.45,1192.17 3554.41,1192.17 U101.5
  Top Layer w20: U102.5 3357.7,1092.91 3293.15,1092.91 3270.45,1115.61 3270.45,1171.61 3291.06,1192.21 U102.7 3505.41,1192.21 3505.45,1192.17
BLO: D105.1 Q102.1 R126.2 U102.18 | length 4383
  Top Layer w25: v1(193,538) 295,538 302,545 ; D105.1 271.88,294.38 R126.2 271.88,469 302,499.12 302,545 ; Q102.1 302,545 ; v1(2337,50) 2579,50 2739,210 2739,623.78 2867,751.78 2867,927 2932.21,992.21 U102.18
  Bottom Layer w25: v1(193,538) 187,532 187,305 442,50 v1(2337,50)
DISABLE: C121.1 D104.2 D106.1 P102.2 R124.2 U102.3 | length 1185.8
  Top Layer w20: P102.2@3229.45,602.61 P102.2 3295.95,604.61 3381.64,518.91 D104.2 ; v1(3268.45,992.61) 3268.65,992.41 3358.2,992.41 U102.3 ; R124.2@3555.17,397.71 R124.2
  Top Layer w25: R124.2@3555.17,397.71 3393.74,397.71 D106.1 D104.2 3393.67,518.7 3555.24,518.7 C121.1
  Bottom Layer w20: P102.2 3177.93,654.13 3177.93,744.29 3180,746.36 3180,904.15 v1(3268.45,992.61)
GND: C100.2 C101.1 C102.1 C103.2 C104.1 C107.1 C108.1 C109.1 C110.1 C111.1 C112.1 C113.2 C114.2 C115.2 C116.2 C117.2 C118.2 C119.1 C120.2 C122.1 C200.1 C201.1 C202.1 C203.1 C204.1 C205.1 C206.1 C207.1 C208.1 C301.1 C302.1 C303.2 C304.1 C401.1 C404.2 C405.2 C407.1 C409.2 C503.2 C504.1 D105.2 D106.2 D107.2 D400.1 D401.1 D402.1 J200.2 J400.3 J400.7 J400.10 J400.11 Q102.2 Q102.3 Q102.5 Q102.6 Q102.7 Q103.2 Q103.3 Q103.5 Q103.6 Q103.7 R3.1 R103.1 R105.1 R116.1 R119.2 R120.2 R122.2 R124.1 R125.2 R126.1 R203.1 R204.2 R205.1 R311.1 R322.1 R400.1 R406.1 R414.1 R415.1 R507.1 R515.1 TP102.1 U100.11 U101.4 U102.4 U102.14 U102.17 U103.2 U103.7 U300.11 U301.11 U400.11 U401.11 U500.11 U501.11 VR200.2 VR201.2 VR202.2 | length 323.1
  Top Layer w25: U102.17 3075.21,1042.21 3107,1074 3107,1168 3082.79,1192.21 U102.14
HDEL: R119.1 U102.8 | length 568.5
  Top Layer w25: U102.8 3503.06,1242.21 3724.51,1463.66 R119.1
LDEL: R120.1 U102.9 | length 420.9
  Top Layer w25: U102.9 3439.06,1292.21 3569.98,1423.13 R120.1
NetC103_1: C103.1 R101.1 R106.2 U100.13 | length 757.8
  Top Layer w25: R106.2 C103.1 4058.83,1335.11 4058.83,1308.34 4156.57,1210.61 R101.1 4156.57,1190.61 4104.45,1138.49 4104.45,991.61 4123.14,972.92 U100.13
NetC200_2: C200.2 D200.1 D202.1 VR200.1 | length 507.4
  Top Layer w50: D202.1 C200.2 2122.62,5248.12 2203,5328.5 2234.49,5297.01 D200.1
NetC203_2: C203.2 C204.2 D201.1 R200.1 VR201.1 | length 814.2
  Top Layer w50: R200.1 C204.2 2925,5346.5 ; C203.2 2925,5346.5 ; D201.1 3209.31,5173.91 3178,5205.21 VR201.1 2928.5,5343 2925,5346.5
NetC208_2: C208.2 VR202.1 | length 122.9
  Top Layer w29.53: C208.2 4021.26,5343.86 4021.26,5221.39 VR202.1
NetC300_2: C300.2 R300.1 R305.2 U300.2
NetC303_1: C303.1 R314.1
NetC304_2: C304.2 R315.1
NetC400_2: C400.2 R400.2 R402.1 U401.6
NetC402_2: C402.2 R404.1 R405.2 U401.2
NetC403_2: C403.2 R406.2 R407.1 U401.9
NetC404_1: C404.1 R405.1
NetC406_2: C406.2 R409.1
NetC407_2: C407.2 R408.1 R409.2 U401.3
NetC408_2: C408.2 R411.1 R412.2 U401.13
NetC409_1: C409.1 R413.2 R414.2 U401.12
NetC500_2: C500.2 R502.2 R503.2 U500.9 | length 541.2
  Top Layer w25: U500.9 6985.14,1079.14 7022.85,1116.85 R502.2 7103.38,1104.35 7103.38,1079.55 7201.12,981.82 C500.2 R503.2
NetC501_1: C501.1 P500.2 U500.6 U500.7 | length 700.1
  Top Layer w25: P500.2 6352.27,1134 6448,1038.28 6448,923.12 6501.12,870 C501.1 6599,860 6708.09,969.09 U500.7 U500.6
NetC501_2: C501.2 R508.2 R509.1 | length 260.8
  Top Layer w25: R508.2 R509.1 6391.38,1000 6391.38,860.5 C501.2
NetC502_1: C502.1 P500.1 | length 236.2
  Top Layer w25: C502.1 6219.35,1271.65 6257,1234 P500.1
NetC502_2: C502.2 R510.1 | length 176.3
  Top Layer w25: C502.2 6229.35,1471.8 6327.09,1374.06 6337.5,1374.06 R510.1
NetC503_1: C503.1 R509.2 U500.5 | length 357.4
  Top Layer w25: R509.2 6502.12,1116.38 6489.62,1128.88 C503.1 6487.13,1129.01 6707.96,1129.01 U500.5
NetC504_2: C504.2 R506.2 R512.1 U500.10 | length 938.7
  Top Layer w25: R512.1@6752.62,874.79 R512.1 R512.1@6767.3,874.79 ; v1(6809,1207) 6813.78,1202.22 6813.78,1151.52 6836.65,1128.65 ; v1(6881,1401) 6881,1402 6926,1447 R506.2 ; U500.10 6900.51,1128.65 6836.65,1128.65 ; C504.2 R512.1@6767.3,874.79 ; R512.1@6767.3,874.79 6779.8,887.29 6779.8,1071.8 6836.65,1128.65
  Bottom Layer w25: v1(6809,1207) 6809,1329 v1(6881,1401)
NetD202_2: D202.2 F200.2 | length 146.4
  Top Layer w100: F200.2 2012.31,5540 D202.2
NetD203_2: D203.2 R203.2 | length 126.8
  Top Layer w50: D203.2 R203.2
NetD204_2: D204.2 R204.1 | length 128.6
  Top Layer w50: D204.2 R204.1
NetD205_2: D205.2 R205.2 | length 137.8
  Top Layer w50: D205.2 R205.2
NetD403_2: D403.2 R415.2
NetD500_1: D500.1 R505.2 R506.1 R507.2 | length 540.8
  Top Layer w25: R506.1 6936,1606.12 6992.15,1549.97 D500.1 7110.97,1549.97 7205,1644 7205,1693.09 R505.2 R507.2
NetD500_2: D500.2 D501.1 U500.14 | length 432
  Top Layer w25: U500.14 7000.32,1329.14 7064.31,1393.13 D501.1 7072.83,1413.47 7103,1413.47 7227.69,1538.16 D500.2
NetP501_1: P501.1 R511.1 | length 183.7
  Top Layer w25: P501.1 6748.62,1593.62 6776.59,1593.62 R511.1
NetR1_1: R1.1 R2.1
NetR100_1: R100.1 R102.2 R105.2 U100.5 | length 552.5
  Top Layer w25: U100.5 4273.63,618.37 4273.63,538.49 4388.14,423.98 R105.2
  Top Layer w50: R105.2 R100.1 R102.2
NetR103_2: R103.2 VR100.3 | length 219.8
  Top Layer w50: R103.2 9833.9,3393.12 VR100.3
NetR104_2: R104.2 U100.9 | length 547.8
  Top Layer w25: U100.9 4323.14,736.92 4358.45,701.61 4411.45,701.61 4498.45,788.61 4618.45,788.61 4648.14,758.92 R104.2
NetR107_2: R107.2 R108.1 U100.6 | length 1018.2
  Top Layer w25: R107.2@3935.76,1024.36 3923.26,1011.86 R107.2 3923.26,824.74 4015,733 4264,733 4322.65,674.35 4322.65,619.35 U100.6 4323.63,618.37 4323.63,553.43 4349.45,527.61 4485.99,527.61 4500.64,542.25 4500.64,551.24 4513.14,563.74 R108.1
NetR109_1: R109.1 R110.1 U100.10 | length 418.2
  Top Layer w25: U100.10 4273.14,918.29 4338.45,983.61 4338.45,1049.04 R110.1 R109.1
NetR109_2: R109.2 VR101.3 | length 372.8
  Top Layer w25: R109.2 4456.83,1197.43 4819.57,1197.43 VR101.3
NetR111_1: R111.1 R112.1 U100.12 | length 620.7
  Top Layer w25: U100.12 4173.14,1027.04 4156.57,1043.61 R112.1 4156.57,1063.61 4257.45,1164.49 4257.45,1252.83 4343.02,1338.39 R111.1
NetR113_1: R113.1 R114.2 U100.2 | length 696.2
  Top Layer w25: R114.2 R113.1 3746.14,760.74 3791,715.88 3791,714 3982,523 4104,523 4123.14,542.14 U100.2
NetR115_2: R115.2 R116.2 U100.3 | length 420.2
  Top Layer w25: R116.2 R115.2 4112.26,383.86 4173.14,444.74 U100.3
NetR121_1: R121.1 U103.5 | length 325.4
  Top Layer w50: U103.5 1384,1967 R121.1
NetR201_1: R201.1 R202.2 VR202.4 | length 378.3
  Top Layer w25: R202.2 3946.3,5119.88 3946.6,5120.18 VR202.4
  Top Layer w50: R201.1 R202.2
NetR202_1: R202.1 VR202.3 | length 195.7
  Top Layer w25: R202.1 3761.44,5225.68 3946.3,5225.68 3946.6,5225.39 VR202.3
NetR301_1: R301.1 R303.2 U300.6
NetR302_1: R302.1 R304.2 U300.13
NetR306_2: R306.2 R308.1 U300.12
NetR307_2: R307.2 R311.2 U300.3
NetR309_1: R309.1 U300.8 U300.10
NetR309_2: R309.2 R310.1 U300.5
NetR312_1: R312.1 R320.2 U301.2
NetR312_2: R312.2 R315.2 R317.2
NetR313_1: R313.1 R318.2 U301.6
NetR313_2: R313.2 R314.2 R316.2
NetR316_1: R316.1 R320.1 U301.7
NetR317_1: R317.1 R321.1 U301.1
NetR319_1: R319.1 R321.2 U301.9
NetR322_2: R322.2 R323.1 U301.10
NetR401_1: R401.1 U400.6 U400.7
NetR410_2: R410.2 U401.10
NetR501_1: R501.1 R505.1 R511.2 U500.13 | length 948.9
  Top Layer w25: R501.1 7090.88,1266.64 7078.38,1279.14 U500.13 6826.86,1279.14 6789.09,1316.91 R511.2 6799.09,1495.88 6857,1553.79 6857,1648 6911.48,1702.48 R505.1@7090.88,1702.48
NetR504_1: R504.1 R510.2 U500.2 | length 437.9
  Top Layer w25: R510.2 6360,1471.8 6457.74,1374.06 6472.5,1374.06 R504.1 6555.74,1361.56 6638.16,1279.14 U500.2
NetR513_2: R513.2 U501.2 VR500.1 | length 517.6
  Top Layer w25: VR500.1 6044.12,716.88 R513.2 6247.12,716.88 6307,657 U501.2
NetR514_2: R514.2 R515.2 U501.3 | length 364.4
  Top Layer w25: R514.2 R515.2 6187.63,607.49 6399.05,607.49 U501.3
PRESENCIA_PLACA: D403.1 J400.8
STANDBY: R122.1 R123.2 U103.6 | length 634.7
  Top Layer w50: U103.6 1382.98,1840.98 1446.45,1840.98 1538,1932.53 R123.2 R122.1
V_HALL: C119.2 R115.1 U103.3 | length 5023
  Top Layer w20: U103.3 1296,1979 1296,2219.18 1352.82,2276 1727.15,2276 1785,2333.85 v1(1785,2335) ; v1(2400,2335) 2402,2333 2535,2333 v1(3058.89,1809.11) ; v1(3135,765) 3135,479 3267,347 3609.58,347 3636.44,373.86 R115.1
  Top Layer w50: C119.2@1076,2218.9 1076,2071 U103.3
  Bottom Layer w20: v1(1785,2335) v1(2400,2335) ; v1(3058.89,1809.11) 3135,1733 v1(3135,765)
V_HIST: P100.1 R110.2 TP100.1 U100.8 | length 923.2
  Top Layer w25: U100.8 4373.14,912.29 4453.26,992.41 R110.2 4453.26,1063.61 4399.45,1117.41 4399.45,1445.92 P100.1 4448.64,1495.11 4611.95,1495.11 TP100.1
V_I*R: U500.3 U501.1 VR500.2 VR500.3 | length 1643.7
  Top Layer w25: VR500.2 5948,914 ; VR500.3 5948,1013 5948,914 ; U501.1 6394.9,707 6393.72,708.18 6392.05,706.51 6330.51,706.51 6329,705 6254.38,779.62 6082.38,779.62 5948,914 ; v1(6589,1188) 6595.76,1188 6636.42,1228.65 6707.6,1228.65 U500.3
  Bottom Layer w25: VR500.3 6504,1014 6589,1099 v1(6589,1188)
VCOMP_A: P1.1 R323.2 TP302.1 U301.8
VCOMP_D: C400.1 P1.3 R402.2 TP400.1 U401.7
VCOMP_DAC: J400.1 R403.1
VDER: P501.2 R504.2 TP501.1 U500.1 | length 690.6
  Top Layer w25: TP501.1@6655,1745 TP501.1 6653,1598 P501.2 6547,1596 6485.3,1534.3 6485.3,1481.5 6490,1476.8 R504.2 6495,1471.8 6637.65,1329.14 U500.1
VERROR1: R305.1 R310.2 TP300.1 U300.7
VERROR2: R308.2 R318.1 TP301.1 U300.14
"VI_ ERROR": R104.1 R108.2 U100.7 | length 346.6
  Top Layer w25: U100.7 4458.02,618.86 4513.14,673.98 R108.2 4533.14,673.98 4545.64,661.48 4545.64,656.24 4638.14,563.74 R104.1
VI_FEED: C406.1 R107.1 R113.2 R508.1 R513.1 TP103.1 U100.1 U400.5 | length 595.2
  Top Layer w25: R113.2 3813.02,870.98 ; R107.1 3813.02,870.98 ; U100.1 4026.14,618.86 3813.02,831.98 3813.02,870.98
VI_FEED_ADC: C402.1 D401.2 J400.5 R404.2 U401.1
VI_FEED_VALOR_MEDIO_ADC: C401.2 D400.2 J400.4 R401.2
VI_REF: P1.2 R102.1
VIN_OSC_HF: P100.2 R106.1 | length 191.6
  Top Layer w25: R106.1 P100.2
VINTEGRADOR: C300.1 R300.2 R306.1 U300.1
VOUT_OSC_HF: P101.1 R101.2 R112.2 TP101.1 U100.14 | length 554.3
  Top Layer w25: R101.2 R112.2 4046.33,974.72 4073.14,947.92 U100.14
  Top Layer w50: TP101.1 3823.23,1384.77 3823.23,1233.83 P101.1
VPOS_EST: P2.2 R303.1 R304.1
VPOS_EST_A: C500.1 P2.1 R503.1 TP500.1 U500.8 | length 506.8
  Top Layer w25: U500.8 7033.56,1029.14 7068.38,994.32 7078.38,994.32 7090.88,981.82 C500.1 R503.1 7091.44,826.23 7091.44,685.56 TP500.1
VPOS_EST_D: C403.1 P2.3 R407.2 TP401.1 U401.8
VPOS_EST_DAC: J400.6 R410.1
VPOS_REF: R2.2 R2.3 R3.2 R413.1 U300.9
VPOS_REF_ADC: C408.1 D402.2 J400.9 R411.2 U401.14
VPST: D501.2 R500.1 R501.2 R502.1 | length 453.4
  Top Layer w25: R502.1 R502.1@7201.12,1120.39 ; D501.2 7227.69,1334.69 7213.62,1320.62 7213.62,1274.38 R501.2 R502.1@7201.12,1120.39 ; R500.1 7213.62,1132.89 R502.1@7201.12,1120.39
VSW: P101.2 U101.1 | length 146.2
  Top Layer w10: U101.1 3678.7,1132.84 3824.22,1132.84 P101.2
pads on no net: P102.1 R2.GND R403.2 U101.2 U101.6 U301.12 U301.13 U301.14 U400.1 U400.2 U400.3 U400.8 U400.9 U400.10 U400.12 U400.13 U400.14 U401.5 U501.5 U501.6 U501.7 U501.8 U501.9 U501.10 U501.12 U501.13 U501.14

## Polygon pours and split planes (outlines as drawn)
BHS on Top Layer "BHS_L01_P002" (solid, pour order 2): 301,2491 301,2490 301,2204 287,2190 287,1654 224,1591 224,771 820,771 1214,1165 1214,1577 582,2496 301,2496
GND on Top Layer "GND_L01_P007" (solid, pour order 7): 332,756 332,11 2305,11 2305,756 2300,761 1965,761 1965,293 1885,165 832,165 832,756
+24V on Top Layer "+24V_L01_P008" (solid, pour order 8): 901.43,5795 1637,5795 1637,5452 899.88,5452
+24V on Top Layer "+24V_L01_P001" (solid, pour order 1): 901.43,5795 1201,5703 1268.44,5452 1101,4654 1101,3353 1209.61,3244.39 2301,2993.1 2301,2491 201,2491 201,3053 501,3353 501,3303 501,5103 701,5303
AHS2 on Top Layer "AHS2_L01_P003" (solid, pour order 3): 1260,1553.77 1608.85,1552.85 1731,1552.53 1731,1116 1289,674 1289,177 833,177 833,749 1260,1176
AHS on Top Layer "AHS_L01_P004" (solid, pour order 4): 1288.97,176 1290.83,646.5 1981.66,1355 2398,1355 2398,778 1875.95,778 1773,672.41 1773,176
AHS on Top Layer "AHS_L01_P006" (solid, pour order 6): 2252,2492 2252,2309 2398,2163 2398,1355 1981.66,1355 1744,1090.31 1744,1714 1967,1937 1967,2493

## Keep-outs
Keep-Out Layer:
  the board outline again, w30

## Text inside footprints (layer, text, board x,y; h text height)
J400: Top Overlay "1" at 7847.83,4592.52 h59.06 r90; Top Overlay "5" at 7847.83,5018.9 h59.06 r90; Top Overlay "9" at 7477.76,4964.37 h59.06 r90; Top Overlay "6" at 7477.76,4637.2 h59.06 r90; Mechanical 29 "6" at 7477.76,4637.2 h59.06 r90; Mechanical 29 "9" at 7477.76,4964.37 h59.06 r90; Mechanical 29 "5" at 7847.83,5018.9 h59.06 r90; Mechanical 29 "1" at 7847.83,4592.52 h59.06 r90